# Altium PCB footprint_2021-12-06.pcbdoc
Units mil, origin at the board's own origin, x right, y up, seen from the top; angles counter-clockwise.
Board outline 8884.02 x 8884.02 mil, 2 copper layers (Top Layer, Bottom Layer); 2 components, 84 nets, 84 pads, 0 vias.
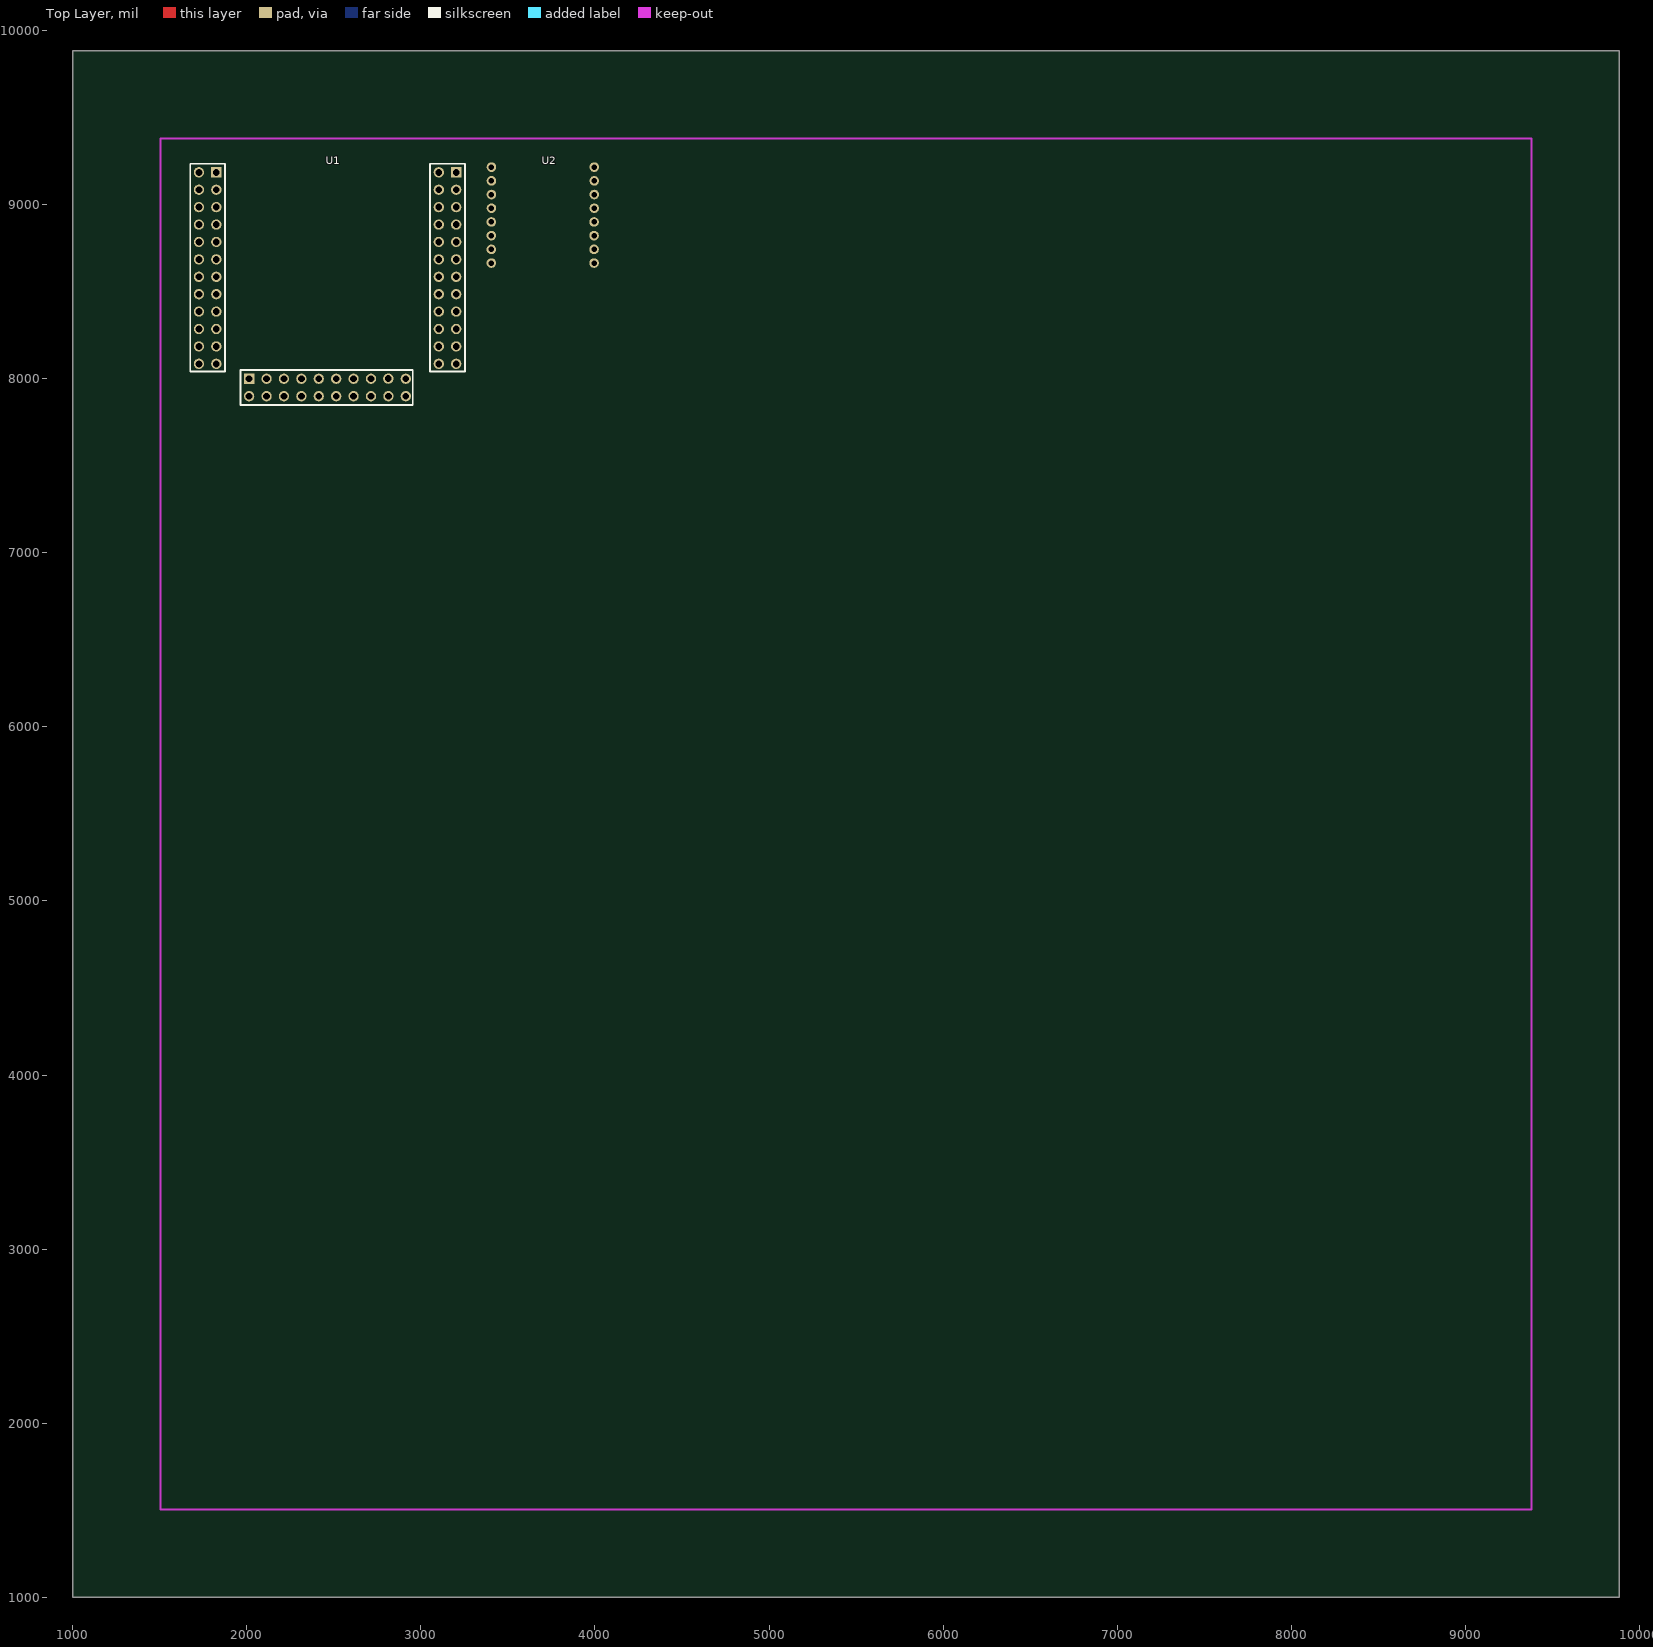
[diagram p0: Top Layer view]
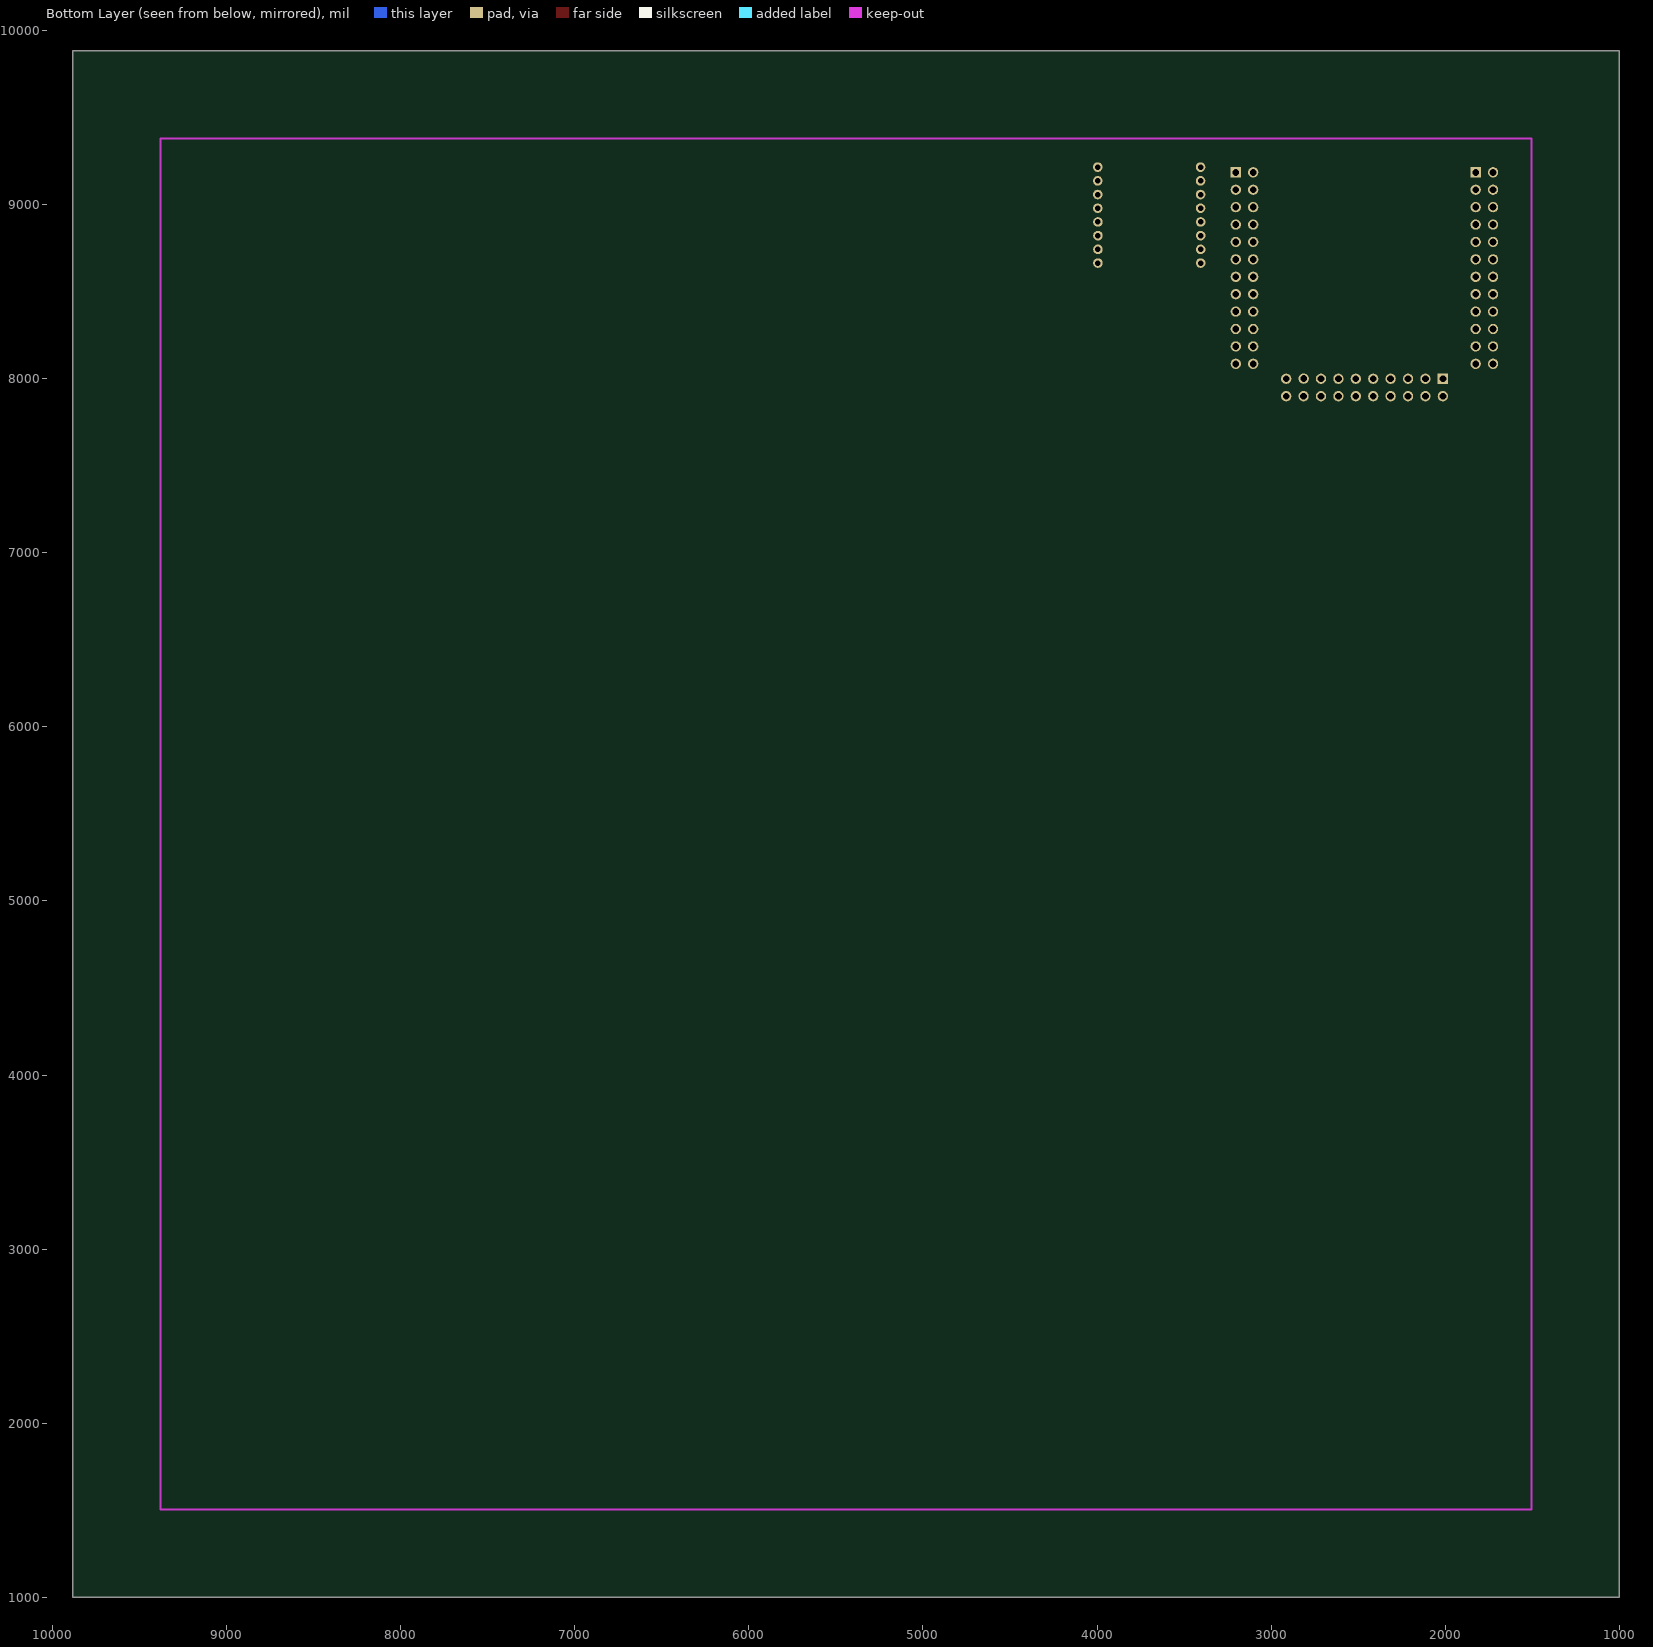
[diagram p1: Bottom Layer view, seen from below]

## Layer stack, top to bottom
Top Layer: signal copper (thickness not stored)
Dielectric: dielectric 12.6, FR-4, Dk 4.8
Bottom Layer: signal copper (thickness not stored)

## Board outline
9884.02,1000 1000,1000 1000,9884.02 9884.02,9884.02

## Components (designator, comment, footprint, x,y, rotation, side; value= is the part's Value field where it differs from the comment)
U1 "NANO_PI_MOD" NANO_PI_MOD 1824.73,8085.26 r0 top
U2 "TB6612_MOD" TB6612_FOOT 3405,8979.02 r0 top

## Footprints (in the part's own frame and the unit in brackets; to place one, negate y for a bottom-side part, rotate by r counter-clockwise, add the part's x,y. Pads: shape width x height; smd on the part's side, far side on the other; paste and mask are expansions set on the pad)
NANO_PI_MOD [mm]
  rect 1.5x1.5 hole 1: 1(35.006,27.94) 25(4.796,-2.18) 45(0.006,27.94)
  round 1.5 hole 1: 2(35.006,25.4) 3(35.006,22.86) 4(35.006,20.32) 5(35.006,17.78) 6(35.006,15.24) 7(35.006,12.7) 8(35.006,10.16) 9(35.006,7.62) 10(35.006,5.08) 11(35.006,2.54) 12(35.006,0) 13(32.466,27.94) 14(32.466,25.4) 15(32.466,22.86) 16(32.466,20.32) 17(32.466,17.78) 18(32.466,15.24) 19(32.466,12.7) 20(32.466,10.16) 21(32.466,7.62) 22(32.466,5.08) 23(32.466,2.54) 24(32.466,0) 26(7.336,-2.18) 27(9.876,-2.18) 28(12.416,-2.18) 29(14.956,-2.18) 30(17.496,-2.18) 31(20.036,-2.18) 32(22.576,-2.18) 33(25.1,-2.159) 34(27.656,-2.18) 35(4.796,-4.72) 36(7.336,-4.72) 37(9.876,-4.72) 38(12.416,-4.72) 39(14.956,-4.72) 40(17.496,-4.72) 41(20.036,-4.72) 42(22.576,-4.72) 43(25.116,-4.72) 44(27.656,-4.72) 46(0.006,25.4) 47(0.006,22.86) 48(0.006,20.32) 49(0.006,17.78) 50(0.006,15.24) 51(0.006,12.7) 52(0.006,10.16) 53(0.006,7.62) 54(0.006,5.08) 55(0.006,2.54) 56(0.006,0) 57(-2.534,27.94) 58(-2.534,25.4) 59(-2.534,22.86) 60(-2.534,20.32) 61(-2.534,17.78) 62(-2.534,15.24) 63(-2.534,12.7) 64(-2.534,10.16) 65(-2.534,7.62) 66(-2.534,5.08) 67(-2.534,2.54) 68(-2.534,0)
  silkscreen extent -3.8,-5.99 36.28,29.21
TB6612_FOOT [mm]
  round 1.4 hole 0.8: 1(0.012,6) 2(0.012,4) 3(0.012,2) 4(0.012,0) 5(-0.012,-2.001) 6(-0.012,-4.001) 7(-0.012,-6.001) 8(-0.012,-8.001) 9(15.012,6) 10(15.012,4) 11(15.012,2) 12(15.012,0) 13(14.988,-2.001) 14(14.988,-4.001) 15(14.988,-6.001) 16(14.988,-8.001)

## Nets (pads, with @x,y where several pads share a name; then routed paths per layer and width w, separated by ;. In a path a pad name is that pad's centre, name@x,y a point inside that pad or via, vN(x,y) a via of type N, cw(c..) or ccw(c..) an arc to the next point about the centre after c; other vN are vias at no path point)
U1_1: U1.1
U1_2: U1.2
U1_3: U1.3
U1_4: U1.4
U1_5: U1.5
U1_6: U1.6
U1_7: U1.7
U1_8: U1.8
U1_9: U1.9
U1_10: U1.10
U1_11: U1.11
U1_12: U1.12
U1_13: U1.13
U1_14: U1.14
U1_15: U1.15
U1_16: U1.16
U1_17: U1.17
U1_18: U1.18
U1_19: U1.19
U1_20: U1.20
U1_21: U1.21
U1_22: U1.22
U1_23: U1.23
U1_24: U1.24
U1_25: U1.25
U1_26: U1.26
U1_27: U1.27
U1_28: U1.28
U1_29: U1.29
U1_30: U1.30
U1_31: U1.31
U1_32: U1.32
U1_33: U1.33
U1_34: U1.34
U1_35: U1.35
U1_36: U1.36
U1_37: U1.37
U1_38: U1.38
U1_39: U1.39
U1_40: U1.40
U1_41: U1.41
U1_42: U1.42
U1_43: U1.43
U1_44: U1.44
U1_45: U1.45
U1_46: U1.46
U1_47: U1.47
U1_48: U1.48
U1_49: U1.49
U1_50: U1.50
U1_51: U1.51
U1_52: U1.52
U1_53: U1.53
U1_54: U1.54
U1_55: U1.55
U1_56: U1.56
U1_57: U1.57
U1_58: U1.58
U1_59: U1.59
U1_60: U1.60
U1_61: U1.61
U1_62: U1.62
U1_63: U1.63
U1_64: U1.64
U1_65: U1.65
U1_66: U1.66
U1_67: U1.67
U1_68: U1.68
U2_1: U2.1
U2_2: U2.2
U2_3: U2.3
U2_4: U2.4
U2_5: U2.5
U2_6: U2.6
U2_7: U2.7
U2_8: U2.8
U2_9: U2.9
U2_10: U2.10
U2_11: U2.11
U2_12: U2.12
U2_13: U2.13
U2_14: U2.14
U2_15: U2.15
U2_16: U2.16

## Silkscreen, mask and mechanical layers (free items; w line width, h text height)
Document:
  lines w0.1: 5441.01,5441.01 5443.01,5443.01